# Altium PCB 剥皮器20200614.PCBDOC
Units mm, origin at the board's own origin, x right, y up, seen from the top; angles counter-clockwise.
Board outline 94.23 x 92 mm, 4 copper layers (Top Layer, MidLayer1, MidLayer2, Bottom Layer); 71 components, 81 nets, 348 pads, 574 vias.
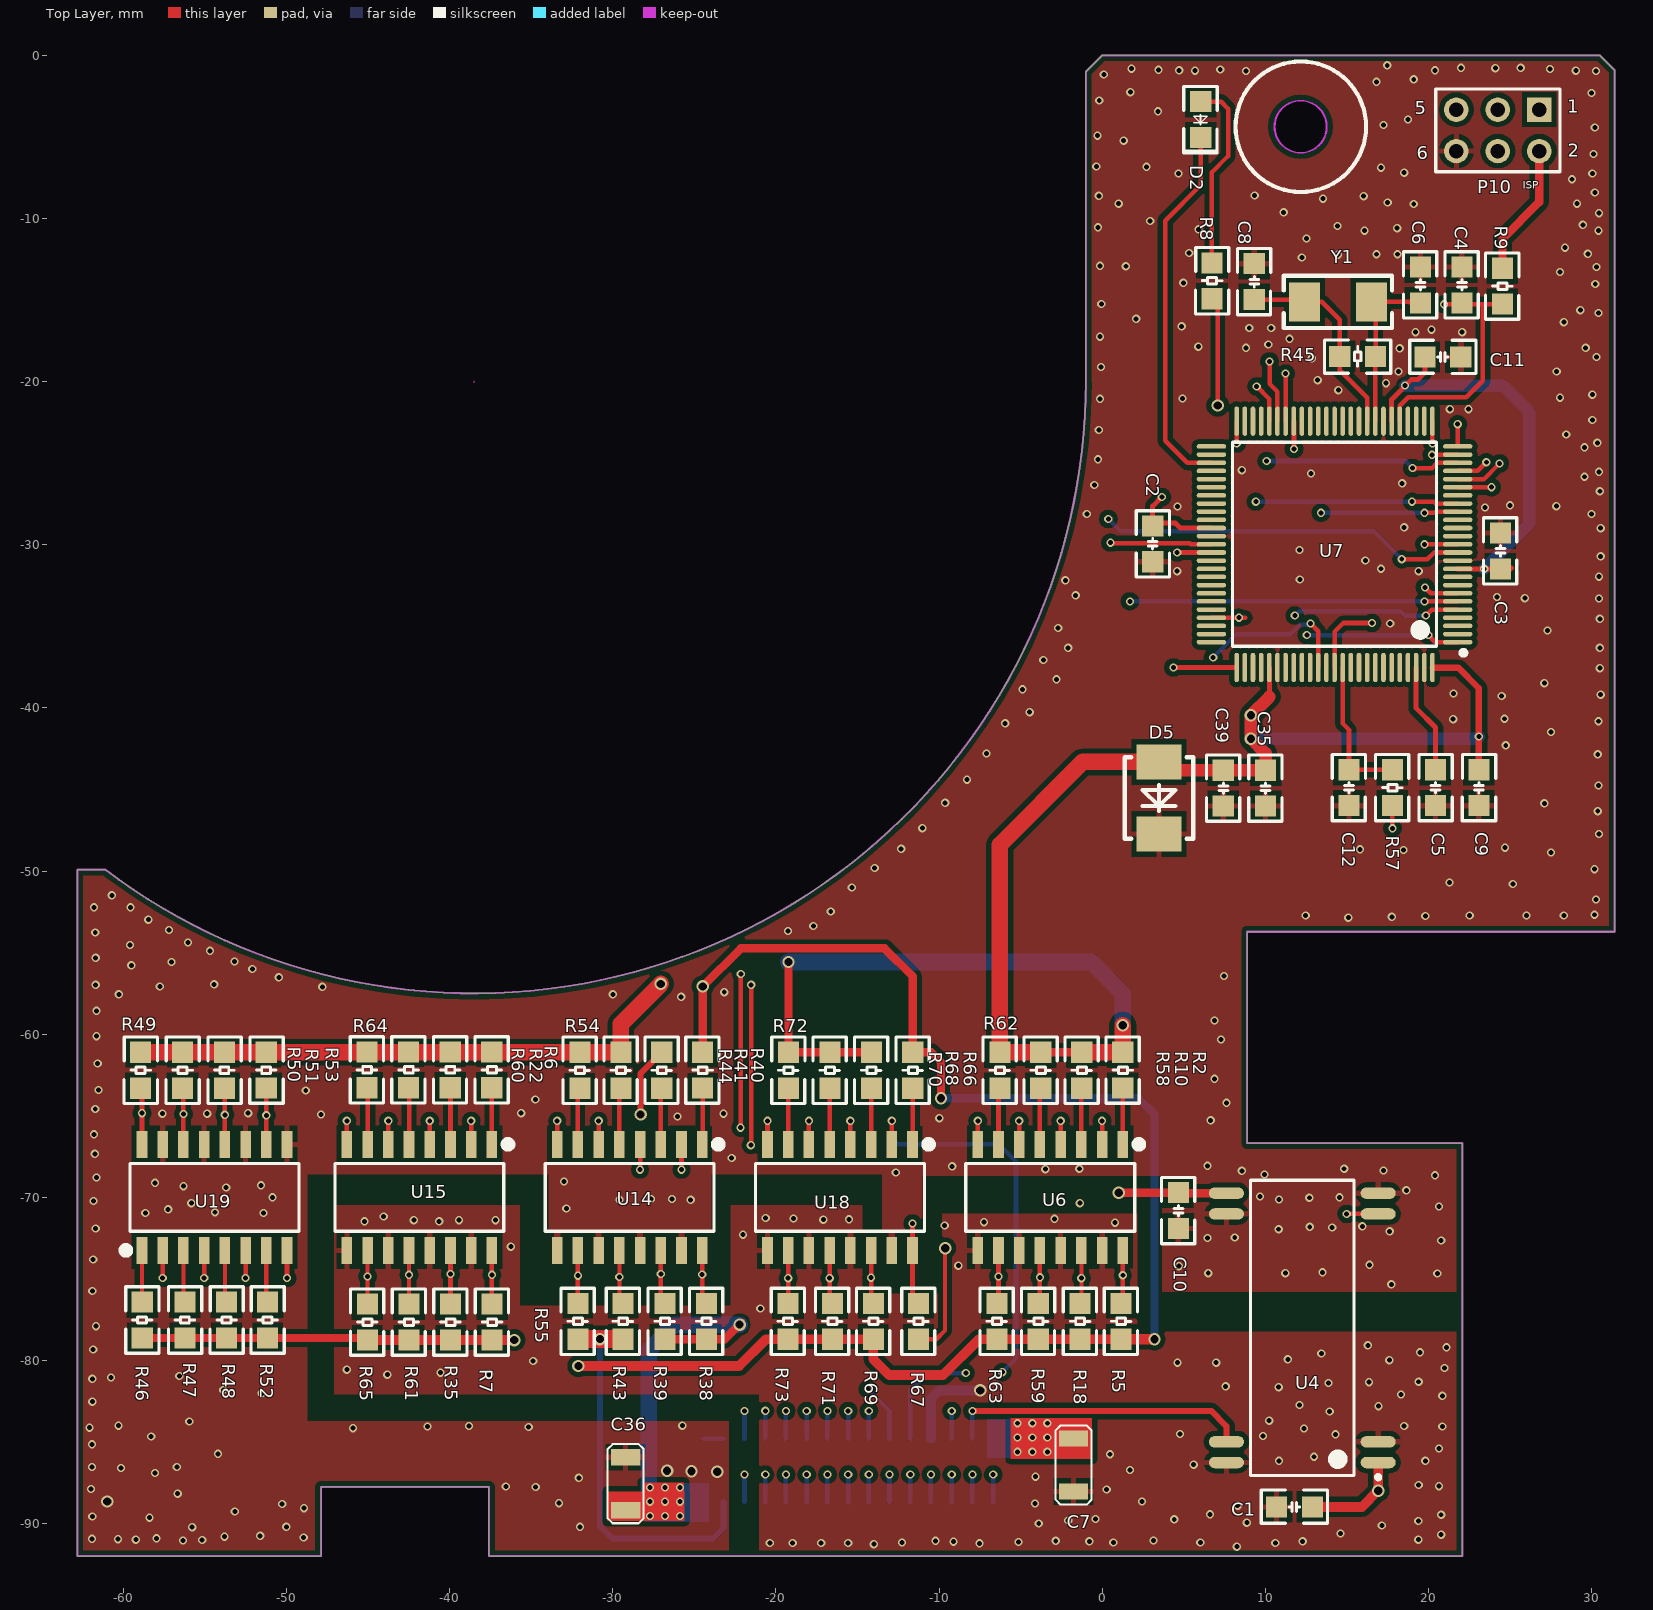
[diagram p0: Top Layer view]
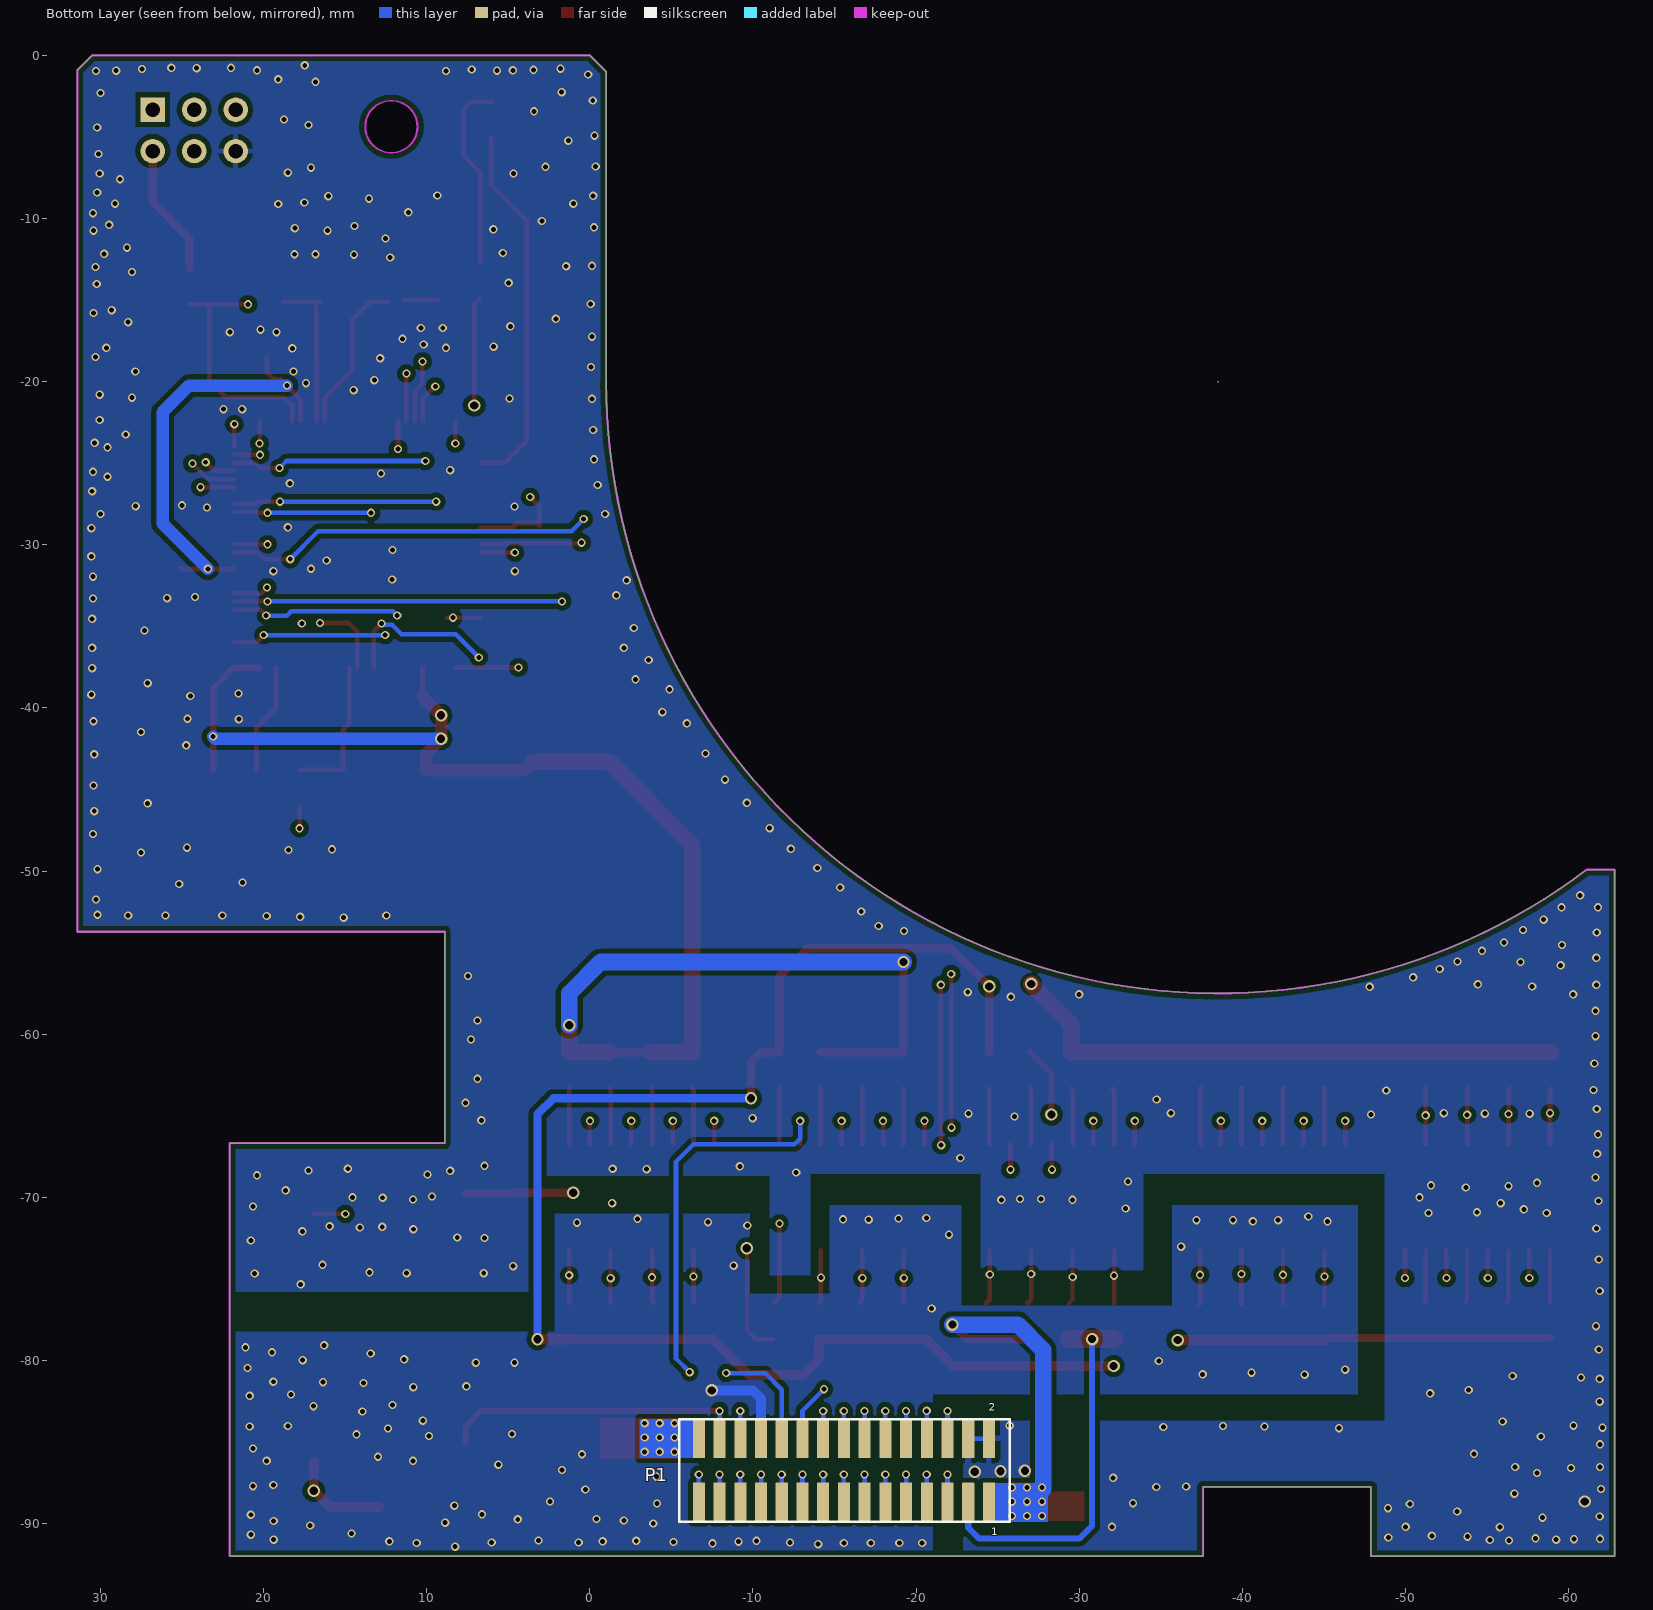
[diagram p1: Bottom Layer view, seen from below]
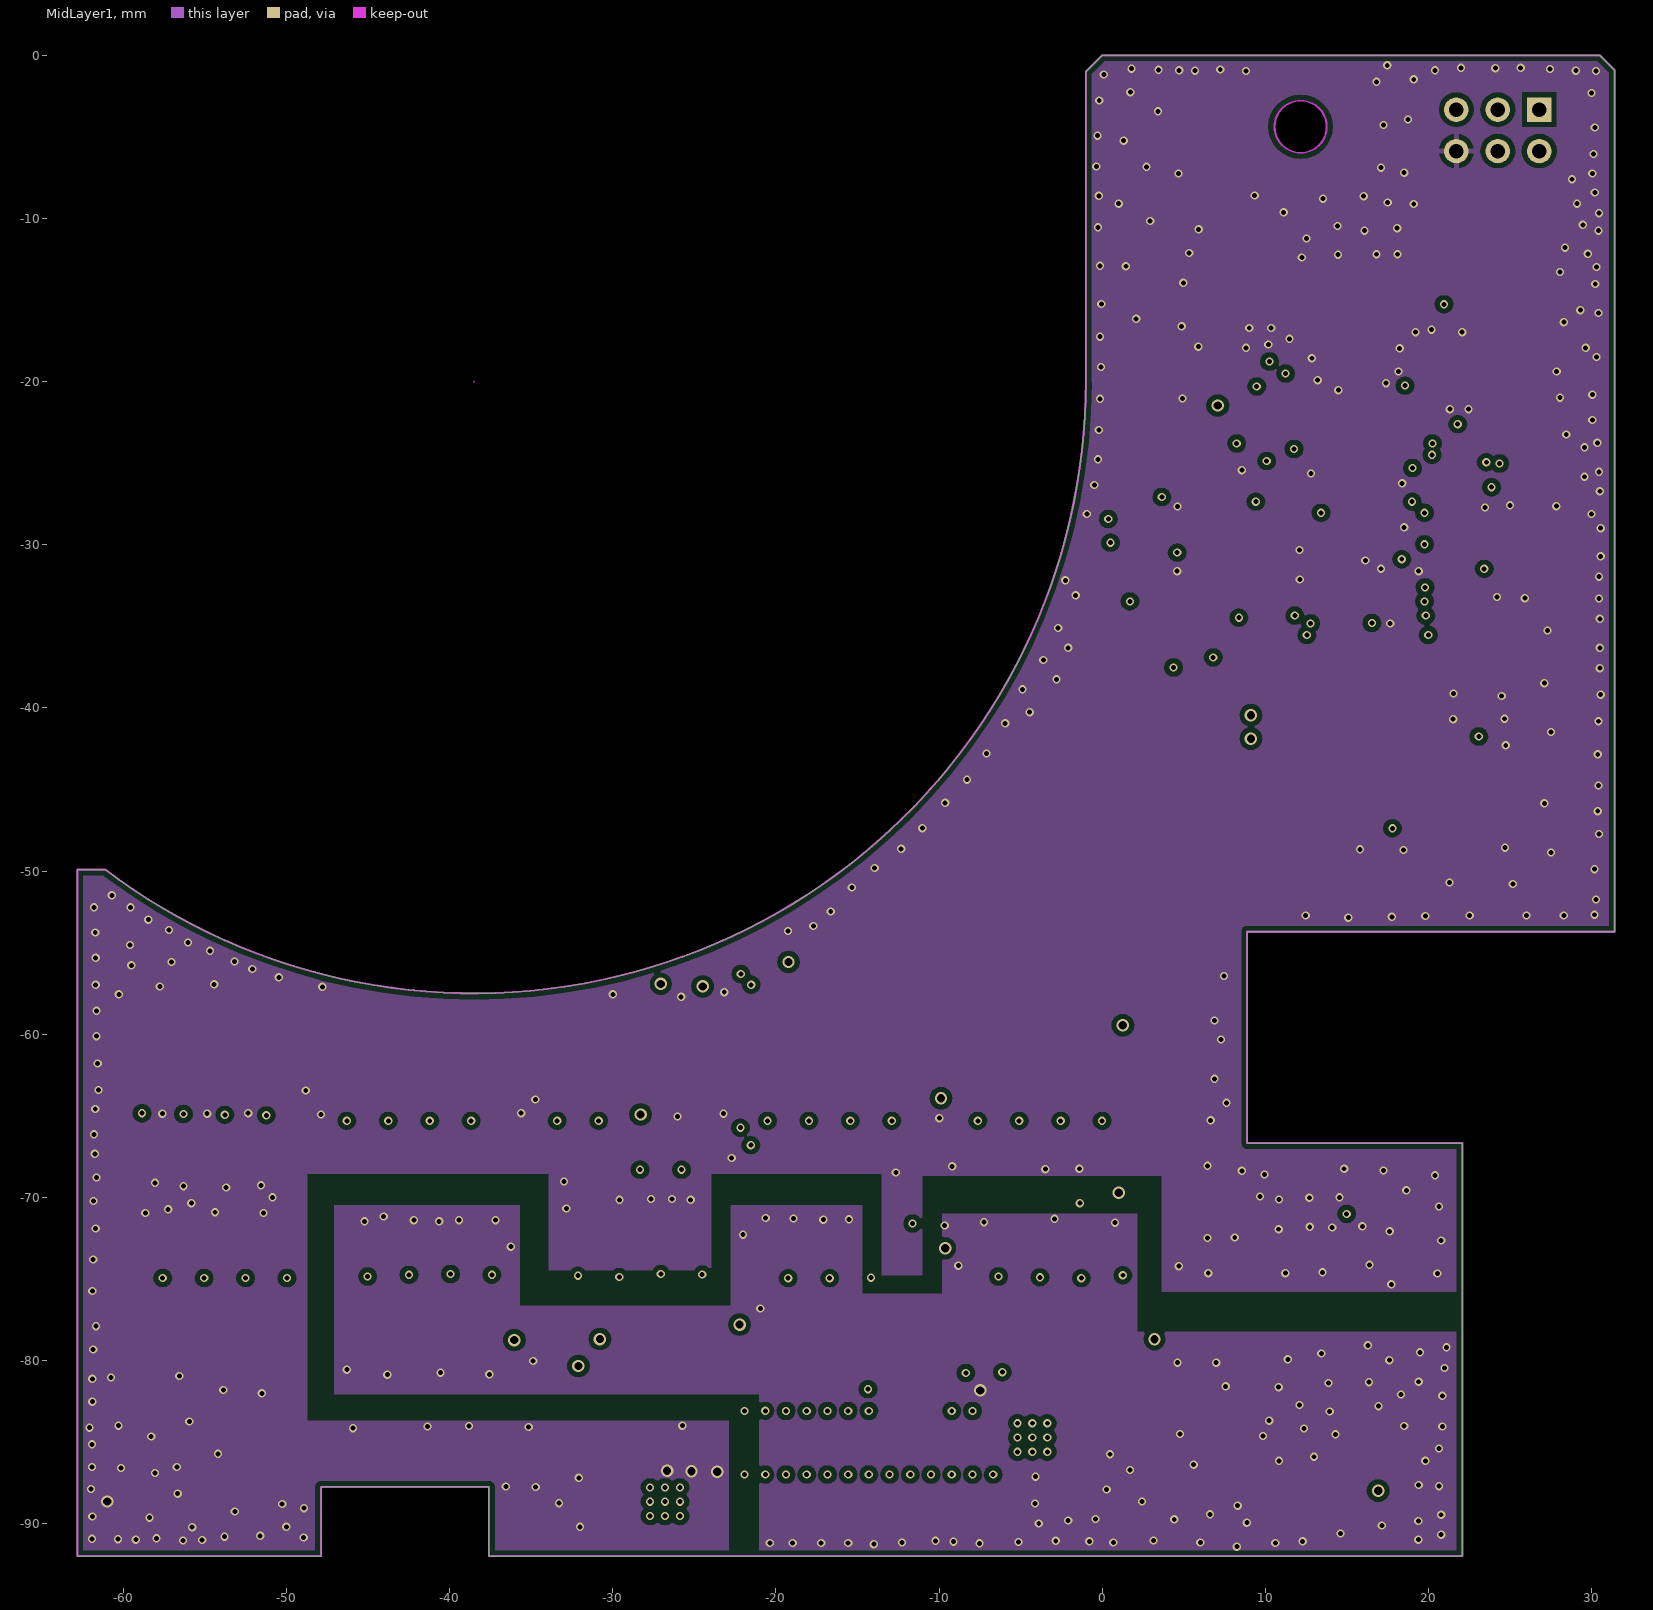
[diagram p2: MidLayer1]
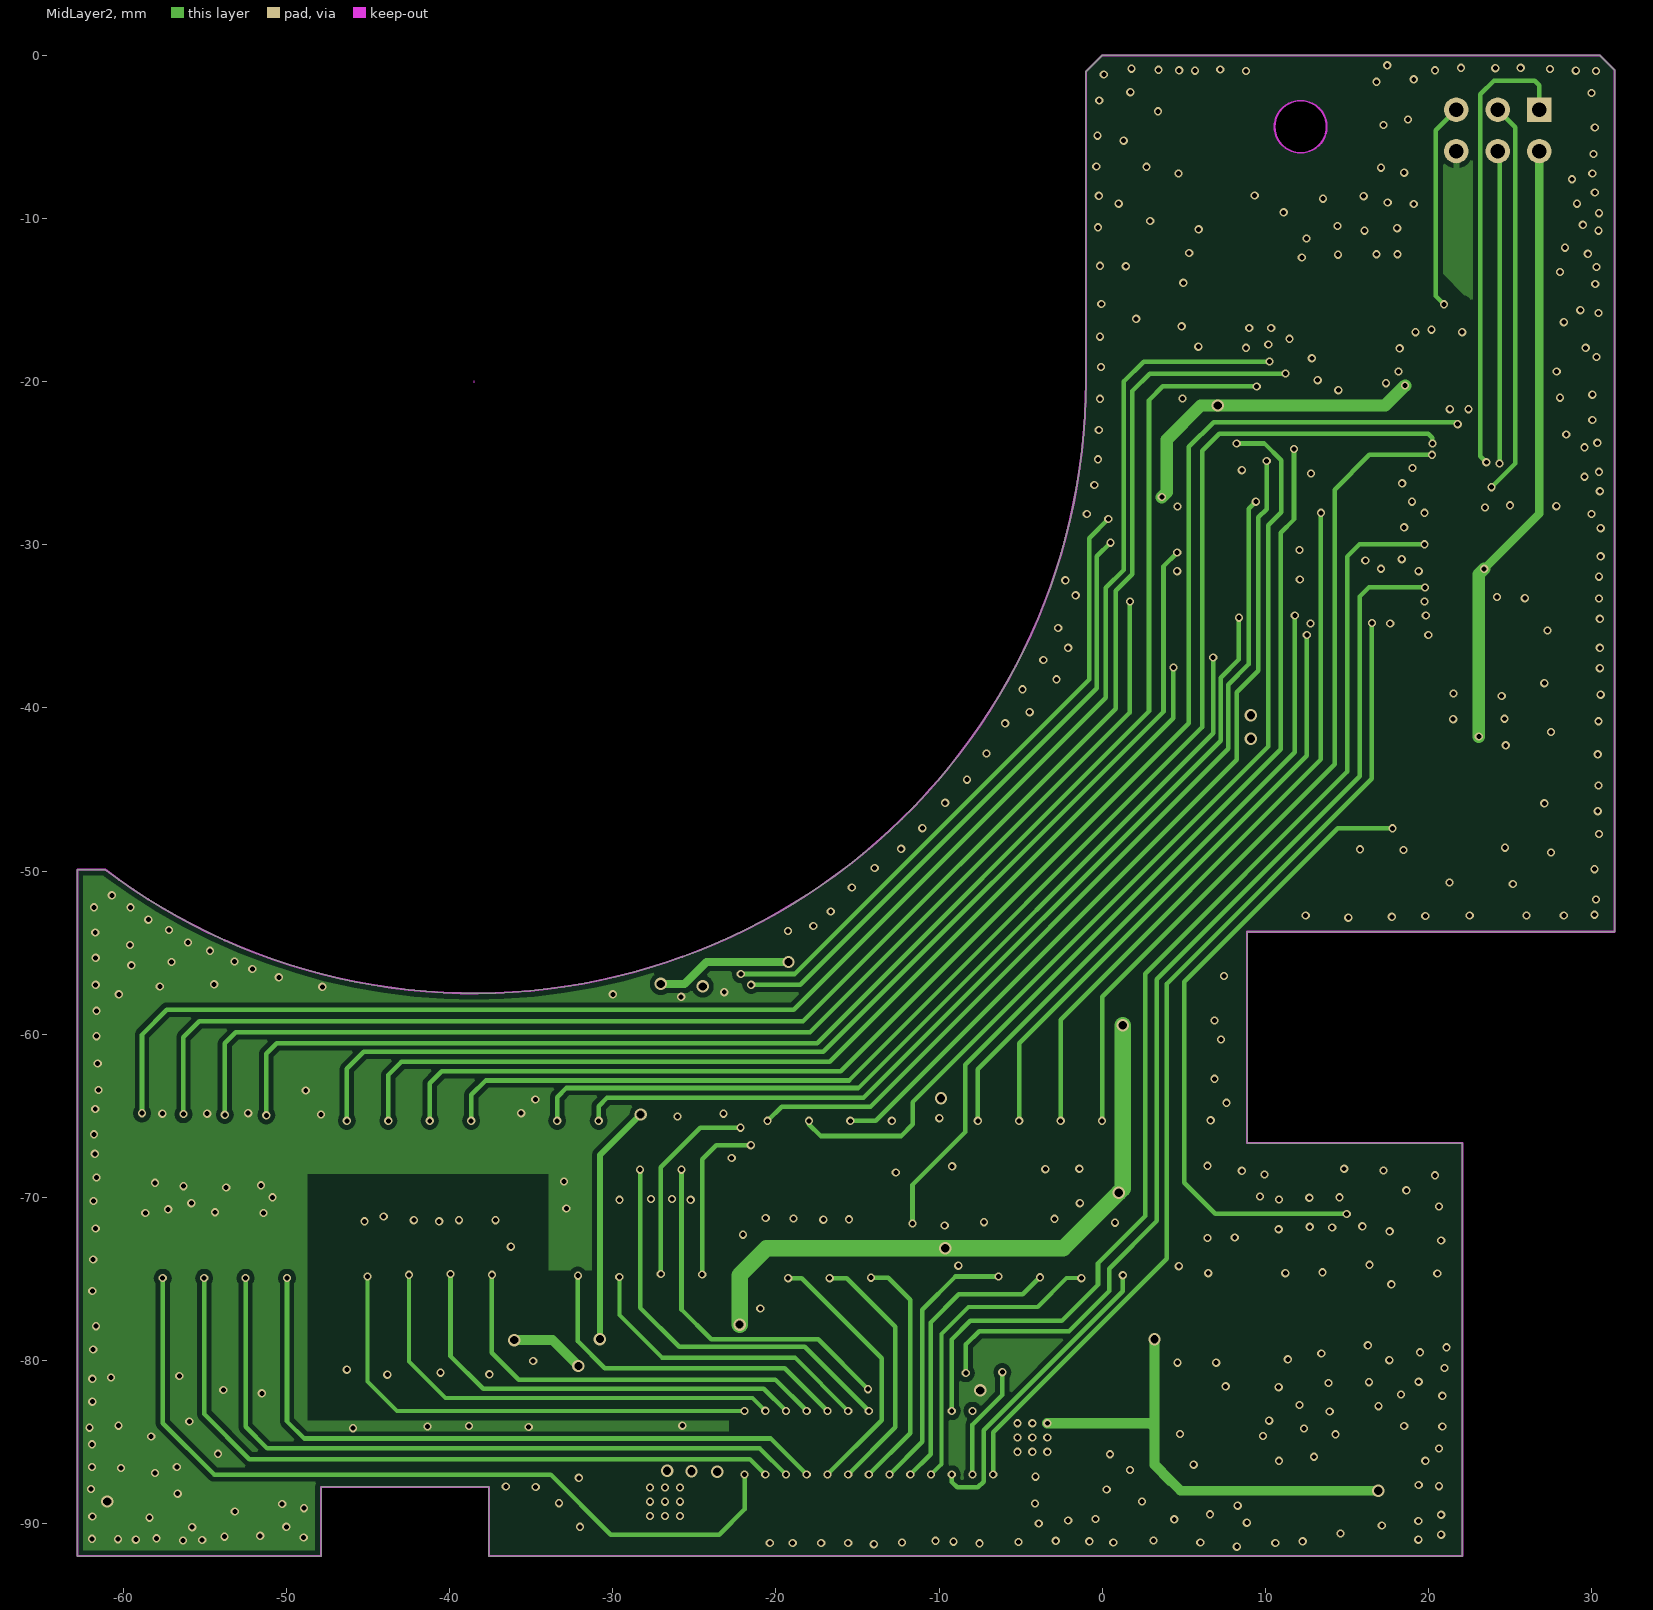
[diagram p3: MidLayer2]

## Layer stack, top to bottom
Top Layer: signal copper 0.0356
Dielectric: core 0.32, FR-4, Dk 4.8
MidLayer1: signal copper 0.0356
Dielectric: prepreg 0.32, FR-4, Dk 4.8
MidLayer2: signal copper 0.0356
Dielectric: core 0.32, FR-4, Dk 4.8
Bottom Layer: signal copper 0.0356

## Board outline
-62.819,-92 -47.879,-92 -47.879,-87.757 -37.592,-87.757 -37.592,-92 22.082,-92 22.082,-66.675 8.89,-66.675 8.89,-53.721 31.415,-53.721 31.415,-0.915 30.5,0 0,0 -1,-1 -1,-20 cw(c-38.5,-20) -61.12,-49.909 -61.12,-49.911 -62.819,-49.911
cut-out: 10.578,-4.375 ccw(c12.178,-4.375) 12.178,-5.975 ccw(c12.178,-4.375) 13.778,-4.375 ccw(c12.178,-4.375) 12.178,-2.775 ccw(c12.178,-4.375)

## Design rules (kind name [scope] priority, off if disabled: settings)
Clearance Clearance_1 [InPolygon] p1: gap=0.305
Clearance [All] p2: gap=0.127
FabricationTestPointUsage TestPointUsage [All] p1: valid=0 allowmultiple=FALSE
FabricationTestpoint Testpoint [All] p1: side=3 testpointundercomponent=TRUE minsize=1.016 maxsize=2.54 preferedsize=1.524 minholesize=0 maxholesize=1.016 preferedholesize=0.813 testpointgrid=0.025 allowsidetop=TRUE allowsidebottom=TRUE usegrid=TRUE gridtolerance=0
PolygonConnect PolygonConnect_1 [IsVia] p1: connectstyle=Direct reliefconductorwidth=0.254 reliefentries=4 polygonreliefangle="90 Angle"
PolygonConnect [All] p2: connectstyle=Relief reliefconductorwidth=0.35 reliefentries=4 polygonreliefangle="90 Angle"
RoutingVias [All] p1: holewidth=0.711 width=1.27 viastyle="Through Hole" minholewidth=0.711 minwidth=1.27 maxholewidth=0.711 maxwidth=1.27
SilkscreenOverComponentPads [All] p1: minsilkscreentomaskgap=0.254
SolderMaskExpansion [All] p1: expansion=0.102
Width [All] p1: maxlimit=10 minlimit=0.1 preferedwidth=0.28
25 further rules are at their usual default settings.

## Components (designator, comment, footprint, x,y, rotation, side; value= is the part's Value field where it differs from the comment)
C1 "104" 0805-C 11.786,-88.976 r0 top
C2 "104" 0805-C 3.099,-29.943 r270 top
C3 "104" 0805-C 24.409,-30.378 r90 top
C4 "104" 0805-C 22.047,-14.072 r90 top
C5 "104" 0805-C 20.429,-44.893 r270 top
C6 "30pF" 0805-C 19.507,-14.072 r90 top
C7 "22uF/25V" 1206C -1.753,-84.785 r270 top
C8 "30pF" 0805-C 9.322,-13.868 r90 top
C9 "104" 0805-C 23.089,-44.893 r270 top
C10 "104" 0805-C 4.674,-70.815 r90 top
C11 "104" 0805-C 20.879,-18.491 r0 top
C12 "104" 0805-C 15.132,-44.893 r90 top
C35 "47uF" 0805-C 10.017,-44.922 r90 top
C36 "22uF/25V" 1206C -29.21,-89.179 r90 top
C39 "47uF" 0805-C 7.426,-44.922 r90 top
D2 "红色" 0805-LED 6.04,-3.939 r90 top
D5 "SMBJ5.0A" LC-SMB(DO-214AA)_S2 3.481,-45.524 r90 top
P1 "Header 15X2" SIP15-1.27 -15.575,-86.743 r0 bottom locked
P10 "2.54针" HDR2X3 26.792,-3.329 r180 top
R2 "330R" 0805-R#1 1.265,-62.206 r270 top
R5 "10K" 0805-R#1 1.164,-77.599 r270 top
R6 "330R" 0805-R#1 -37.413,-62.186 r270 top
R7 "10K" 0805-R#1 -37.394,-77.65 r270 top
R8 "1K" 0805-R#2 6.731,-13.818 r270 top
R9 "10K" 0805-R#2 24.536,-14.148 r90 top
R10 "330R" 0805-R#1 -1.247,-62.211 r270 top
R18 "10K" 0805-R#2 -1.351,-77.599 r90 top
R22 "330R" 0805-R#2 -39.962,-62.186 r90 top
R35 "10K" 0805-R#1 -39.942,-77.65 r270 top
R38 "10K" 0805-R#1 -24.262,-77.599 r270 top
R39 "10K" 0805-R#1 -26.802,-77.599 r270 top
R40 "330R" 0805-R#1 -24.49,-62.206 r270 top
R41 "330R" 0805-R#1 -26.998,-62.211 r270 top
R43 "10K" 0805-R#1 -29.367,-77.599 r270 top
R44 "330R" 0805-R#1 -29.505,-62.211 r270 top
R45 "1M" 0805-R#1 15.662,-18.452 r0 top
R46 "330R" 0805-R#1 -58.844,-77.523 r90 top
R47 "330R" 0805-R#1 -56.228,-77.523 r90 top
R48 "330R" 0805-R#1 -53.675,-77.523 r90 top
R49 "10K" 0805-R#1 -58.944,-62.211 r90 top
R50 "10K" 0805-R#1 -56.375,-62.211 r90 top
R51 "10K" 0805-R#1 -53.806,-62.211 r90 top
R52 "330R" 0805-R#1 -51.16,-77.523 r90 top
R53 "10K" 0805-R#1 -51.237,-62.206 r90 top
R54 "330R" 0805-R#1 -32.012,-62.211 r270 top
R55 "10K" 0805-R#1 -32.136,-77.599 r270 top
R57 "2K" 0805-R#1 17.792,-44.893 r270 top
R58 "330R" 0805-R#1 -3.76,-62.211 r270 top
R59 "10K" 0805-R#1 -3.916,-77.599 r270 top
R60 "330R" 0805-R#1 -42.51,-62.186 r270 top
R61 "10K" 0805-R#1 -42.491,-77.65 r270 top
R62 "330R" 0805-R#1 -6.273,-62.211 r270 top
R63 "10K" 0805-R#1 -6.456,-77.599 r270 top
R64 "330R" 0805-R#1 -45.059,-62.186 r270 top
R65 "10K" 0805-R#1 -45.039,-77.65 r270 top
R66 "330R" 0805-R#1 -11.607,-62.211 r270 top
R67 "10K" 0805-R#1 -11.257,-77.599 r270 top
R68 "330R" 0805-R#1 -14.147,-62.211 r270 top
R69 "10K" 0805-R#1 -14.026,-77.599 r270 top
R70 "330R" 0805-R#1 -16.687,-62.211 r270 top
R71 "10K" 0805-R#1 -16.54,-77.599 r270 top
R72 "330R" 0805-R#1 -19.227,-62.211 r270 top
R73 "10K" 0805-R#1 -19.258,-77.599 r270 top
U4 "ISO124U" SOIC127P1030X265-8 12.268,-78.003 r180 top
U6 "TLP291-4" TLP291-4 -3.18,-70.004 r180 top
U7 "ATmega2560-16AU" LC-LQFP-100_14x14x05P 14.245,-29.974 r90 top
U14 "TLP291-4" TLP291-4 -28.961,-70.004 r180 top
U15 "TLP291-4" TLP291-4 -41.852,-70.004 r180 top
U18 "TLP291-4" TLP291-4 -16.071,-70.004 r180 top
U19 "TLP291-4" TLP291-4 -54.412,-70.004 r0 top
Y1 "16M" LC-SMD-5032_2P 14.453,-15.113 r180 top

## Footprints (in the part's own frame and the unit in brackets; to place one, negate y for a bottom-side part, rotate by r counter-clockwise, add the part's x,y. Pads: shape width x height; smd on the part's side, far side on the other; paste and mask are expansions set on the pad)
0805-C [mil] "0805贴片电容"
  rect 51x51 smd: 1(-43.31,0) 2(43.31,0)
  silkscreen extent -80,-40 80,41
0805-LED [mil] "0805LED"
  rect 51x51 smd: 1(43.31,0) 2(-43.31,0)
  silkscreen extent -81,-41 80,41
0805-R#1 [mil] "0805电阻"
  rect 51x51 smd: 1(43.31,0) 2(-43.31,0)
  silkscreen extent -80,-41 80,40
0805-R#2 [mil] "0805电阻"
  rect 51x51 smd: 1(-43.31,0) 2(43.31,0)
  silkscreen extent -80,-40 80,41
1206C [mm]
  rect 1x1.8 smd: 1(0,0) 2(3.25,0)
  silkscreen extent -0.8,-1.1 4.05,1.1
HDR2X3 [mm] "Connector; Header; 3x2 Position"
  rect 1.5x1.5 hole 0.9: 1(0,0)
  round 1.5 hole 0.9: 2(0,2.54) 3(2.54,0) 4(2.54,2.54) 5(5.08,0) 6(5.08,2.54)
  silkscreen extent -1.27,-1.27 6.35,3.81
LC-LQFP-100_14x14x05P [mm]
  oval 0.28x1.8 smd mask+0.051: 1(-6,-7.55) 2(-5.5,-7.55) 3(-5,-7.55) 4(-4.5,-7.55) 5(-4,-7.55) 6(-3.5,-7.55) 7(-3,-7.55) 8(-2.5,-7.55) 9(-2,-7.55) 10(-1.5,-7.55) 11(-1,-7.55) 12(-0.5,-7.55) 13(0,-7.55) 14(0.5,-7.55) 15(1,-7.55) 16(1.5,-7.55) 17(2,-7.55) 18(2.5,-7.55) 19(3,-7.55) 20(3.5,-7.55) 21(4,-7.55) 22(4.5,-7.55) 23(5,-7.55) 24(5.5,-7.55) 25(6,-7.55) 51(6,7.55) 52(5.5,7.55) 53(5,7.55) 54(4.5,7.55) 55(4,7.55) 56(3.5,7.55) 57(3,7.55) 58(2.5,7.55) 59(2,7.55) 60(1.5,7.55) 61(1,7.55) 62(0.5,7.55) 63(0,7.55) 64(-0.5,7.55) 65(-1,7.55) 66(-1.5,7.55) 67(-2,7.55) 68(-2.5,7.55) 69(-3,7.55) 70(-3.5,7.55) 71(-4,7.55) 72(-4.5,7.55) 73(-5,7.55) 74(-5.5,7.55) 75(-6,7.55)
  oval 1.8x0.28 smd mask+0.051: 26(7.55,-6) 27(7.55,-5.5) 28(7.55,-5) 29(7.55,-4.5) 30(7.55,-4) 31(7.55,-3.5) 32(7.55,-3) 33(7.55,-2.5) 34(7.55,-2) 35(7.55,-1.5) 36(7.55,-1) 37(7.55,-0.5) 38(7.55,0) 39(7.55,0.5) 40(7.55,1) 41(7.55,1.5) 42(7.55,2) 43(7.55,2.5) 44(7.55,3) 45(7.55,3.5) 46(7.55,4) 47(7.55,4.5) 48(7.55,5) 49(7.55,5.5) 50(7.55,6) 76(-7.55,6) 77(-7.55,5.5) 78(-7.55,5) 79(-7.55,4.5) 80(-7.55,4) 81(-7.55,3.5) 82(-7.55,3) 83(-7.55,2.5) 84(-7.55,2) 85(-7.55,1.5) 86(-7.55,1) 87(-7.55,0.5) 88(-7.55,0) 89(-7.55,-0.5) 90(-7.55,-1) 91(-7.55,-1.5) 92(-7.55,-2) 93(-7.55,-2.5) 94(-7.55,-3) 95(-7.55,-3.5) 96(-7.55,-4) 97(-7.55,-4.5) 98(-7.55,-5) 99(-7.55,-5.5) 100(-7.55,-6)
  silkscreen extent -6.8,-8.05 6.25,6.25
LC-SMB(DO-214AA)_S2 [mm]
  rect 2.159x2.743 smd: 1(2.21,0) 2(-2.21,0)
  silkscreen extent -2.5,-2.1 2.5,2.1
LC-SMD-5032_2P [mm]
  rect 1.9x2.4 smd: 1(-2.05,0) 2(2.05,0)
  silkscreen extent -3.32,-1.6 3.32,1.6
SIP15-1.27 [mm]
  rrect5% 0.74x2.4 smd: 1(-8.89,1.95) 2(-8.89,-1.95) 3(-7.62,1.95) 4(-7.62,-1.95) 5(-6.35,1.95) 6(-6.35,-1.95) 7(-5.08,1.95) 8(-5.08,-1.95) 9(-3.81,1.95) 10(-3.81,-1.95) 11(-2.54,1.95) 12(-2.54,-1.95) 13(-1.27,1.95) 14(-1.27,-1.95) 15(0,1.95) 16(0,-1.95) 17(1.27,1.95) 18(1.27,-1.95) 19(2.54,1.95) 20(2.54,-1.95) 21(3.81,1.95) 22(3.81,-1.95) 23(5.08,1.95) 24(5.08,-1.95) 25(6.35,1.95) 26(6.35,-1.95) 27(7.62,1.95) 28(7.62,-1.95) 29(8.89,1.95) 30(8.89,-1.95)
  silkscreen extent -10.16,-3.15 10.11,3.15
SOIC127P1030X265-8 [mm] "SOIC, 28-Leads, Body 18.1x7.6mm (max), Pitch 1.27mm, IPC Medium Density"
  oval 2.15x0.7 smd: 1(-4.65,8.255) 2(-4.65,6.985) 13(-4.65,-6.985) 14(-4.65,-8.255) 15(4.65,-8.255) 16(4.65,-6.985) 27(4.65,6.985) 28(4.65,8.255)
  silkscreen extent -4.78,-9.05 3.18,9.28
TLP291-4 [mm]
  rect 0.65x1.65 smd: 1(-4.445,-3.25) 2(-3.175,-3.25) 3(-1.905,-3.25) 4(-0.635,-3.25) 5(0.635,-3.25) 6(1.905,-3.25) 7(3.175,-3.25) 8(4.445,-3.25) 9(4.445,3.25) 10(3.175,3.25) 11(1.905,3.25) 12(0.635,3.25) 13(-0.635,3.25) 14(-1.905,3.25) 15(-3.175,3.25) 16(-4.445,3.25)
  silkscreen extent -5.63,-3.45 5.18,2.08, body extent -5.17,-3.5 5.18,3.5, height 2.3

## Part data
C1 C2 C3 C4 C5 C6 C8 C9 C10 C12 C35: library part Cap, "Capacitor"
C7 C11 C36 C39: library part CAP, "Capacitor"
D2: library part LED0, "Typical INFRARED GaAs LED"
D5: library part TVS, "TVS"
P1: "Header, 15-Pin, Dual row"
P10: library part "Header 3X2", "Header, 3-Pin, Dual row"
R2 R5 R6 R7 R8 R9 R10 R18 R22 R35 R38 R39 R40 R41 R43 R44 R45 R46 R47 R48 R49 R50 R51 R52 R53 R54 R55 R57 R58 R59 R60 R61 R62 R63 R64 R65 R66 R67 R68 R69 R70 R71 R72 R73: library part Res2, "Resistor"
U6 U14 U15 U18 U19: "Photocouplers GaAs Infrared LED & Photo Transistor"
U7: library part "Arduino MEGA 2560"
Y1: library part XTAL, "Crystal Oscillator"

## Via types
v1: diameter 0.508, hole 0.305, Top Layer to Bottom Layer, tented both sides, 552 vias
v2: diameter 0.762, hole 0.508, Top Layer to Bottom Layer, tented both sides, 22 vias

## Nets (pads, with @x,y where several pads share a name; then routed paths per layer and width w, separated by ;. In a path a pad name is that pad's centre, name@x,y a point inside that pad or via, vN(x,y) a via of type N, cw(c..) or ccw(c..) an arc to the next point about the centre after c; other vN are vias at no path point)
+3.3V: P1.3 R41.2 R43.1 R55.1 | length 43.1
  Top Layer w0.381: v2(-28.296,-64.922) -28.296,-62.409 R41.2
  Top Layer w1.1: R55.1 R43.1
  MidLayer2 w0.381: v2(-30.785,-78.689) -30.785,-67.412 v2(-28.296,-64.922)
  Bottom Layer w0.381: v2(-30.785,-78.689) -30.785,-90.145 -30.023,-90.907 -23.851,-90.907 -23.195,-90.251 P1.3
+5V: C1.2 C7.1 P1.30 R5.1 R7.1 R18.1 R35.1 R40.2 R46.2 R47.2 R48.2 R52.2 R59.1 R61.1 R63.1 R65.1 R66.2 R69.1 R71.1 R73.1 U4.1 | length 160.8
  Top Layer w0.254: R47.2 R48.2
  Top Layer w0.508: R46.2 R47.2 R48.2 R52.2 -45.166,-78.623 R65.1 ; R40.2 -24.49,-57.079 v2(-24.486,-57.074) -22.149,-54.737 -13.335,-54.737 -11.607,-56.465 R66.2 -10.466,-61.111 -9.881,-61.697 v2(-9.881,-63.932)
  Top Layer w0.6: R65.1 R61.1 ; v2@-36.017,-78.765 v2(-36.033,-78.75) R7.1 R35.1 ; v2(-32.106,-80.34) -22.25,-80.34 -20.609,-78.699 R73.1 R71.1 R69.1 -14.026,-79.929 -13.056,-80.899 -9.754,-80.899 -7.553,-78.699 R63.1 R59.1 R18.1 R5.1 ; C1.2 15.926,-88.976 v2(16.918,-87.984) U4.1 ; R61.1 R35.1 ; R61.1 R35.1
  Top Layer w0.635: R5.1 v2(3.21,-78.699)
  MidLayer2 w0.6: v2(-36.033,-78.75) -33.696,-78.75 v2(-32.106,-80.34) ; 4.184,-87.369 4.799,-87.984 v2(16.918,-87.984)
  MidLayer2 w0.635: v1(-3.362,-83.849) 2.934,-83.849 3.21,-84.125 ; v2(3.21,-78.699) 3.21,-84.125 ; 4.184,-87.369 3.21,-86.395 3.21,-84.125
  Bottom Layer w0.508: v2(-9.881,-63.932) 2.235,-63.932 3.21,-64.907 v2(3.21,-78.699)
  other v1: -5.191,-85.602 -4.277,-85.602 -3.362,-85.602 -5.191,-84.725 -4.277,-84.725 -3.362,-84.725 -5.191,-83.849 -4.277,-83.849
+5VV: C2.1 C3.1 C9.1 C10.2 C11.1 C35.2 C36.1 C39.2 D5.1 P1.1 P10.2 R2.2 R6.2 R8.2 R9.2 R10.2 R22.2 R38.1 R39.1 R44.2 R49.1 R50.1 R51.1 R53.1 R54.2 R58.2 R60.2 R62.2 R64.2 R67.1 R68.2 R70.2 R72.2 U4.15 U7.10 U7.31 U7.61 U7.80 U7.100 | length 348.9
  Top Layer w0.254: v2(-22.225,-77.8) v2@-22.022,-77.597 ; R67.1 -10.17,-78.699 -9.627,-78.156 v2(-9.627,-73.127) ; R8.2 7.087,-15.273 v2(7.087,-21.463)
  Top Layer w0.305: v1(3.658,-27.076) 3.099,-27.635 C2.1 3.265,-28.677 4.496,-28.677 4.793,-28.974 U7.61 ; C35.2 C35.2@10.245,-43.594 ; 10.245,-39.319 U7.80 ; U7.31 17.745,-21.092 18.974,-19.863 19.38,-19.863 19.779,-19.464 C11.1 ; U7.10 v1(23.419,-31.474) 25.046,-31.474 25.09,-31.429
  Top Layer w0.381: U7.100@20.255,-37.524 20.272,-37.541 21.844,-37.541 23.089,-38.786 v1(23.089,-41.758) C9.1
  Top Layer w0.508: R50.1 R51.1 -51.241,-61.111 R53.1 -45.079,-61.106 R64.2 R60.2 R22.2 R6.2 -32.038,-61.086 R54.2 ; R39.1 R38.1 -23.124,-78.699 v2(-22.225,-77.8) ; v2@-19.228,-55.575 v2(-19.227,-55.576) R72.2 R70.2 R68.2 ; R58.2 R10.2 ; v2(1.016,-69.723) 1.024,-69.715 C10.2 4.707,-69.748 U4.15 ; R2.2@1.261,-61.111 R2.2 ; R9.2 24.536,-11.252 26.792,-8.996 P10.2
  Top Layer w0.762: D5.1 3.989,-43.822 C35.2 10.017,-42.783 v2(9.119,-41.885) v2(9.119,-40.445) 10.245,-39.319
  Top Layer w1.016: R49.1 R54.2 R44.2 -29.505,-59.375 v2(-27.051,-56.921) ; R58.2 R62.2 -6.273,-48.386 -1.201,-43.314 D5.1 ; R10.2 R2.2@1.261,-61.111 ; R2.2 v2(1.265,-59.457)
  MidLayer2 w0.508: v2(-27.051,-56.921) -25.603,-56.921 -24.258,-55.576 v2(-19.227,-55.576) ; v1(23.419,-31.474) 26.792,-28.1 P10.2
  MidLayer2 w0.762: v1(3.658,-27.076) 3.962,-26.772 3.962,-23.546 6.045,-21.463 v2(7.087,-21.463) 17.348,-21.463 v1(18.567,-20.244) ; v1(23.089,-41.758) 23.089,-31.804 v1(23.419,-31.474)
  MidLayer2 w1.016: v2(-22.225,-77.8) -22.225,-74.778 -20.574,-73.127 -2.388,-73.127 v2(1.016,-69.723) 1.265,-69.474 v2(1.265,-59.457)
  Bottom Layer w0.762: v2(9.119,-41.885) 22.962,-41.885 v1(23.089,-41.758) ; v1(18.567,-20.244) 24.562,-20.244 26.187,-21.869 26.187,-28.705 v1(23.419,-31.474)
  Bottom Layer w1.016: v1@-27.788,-87.884 -27.788,-79.35 -26.238,-77.8 v2(-22.225,-77.8) ; v2(-19.227,-55.576) -0.659,-55.576 1.265,-57.501 v2(1.265,-59.457)
  other v1: -27.711,-89.535 -26.797,-89.535 -25.883,-89.535 -27.711,-88.659 -26.797,-88.659 -25.883,-88.659 -27.711,-87.782 -26.797,-87.782 -25.883,-87.782
ADC8: C12.2 R57.2 U7.89 | length 9.1
  Top Layer w0.28: U7.89 14.745,-40.957 15.132,-41.345 C12.2 R57.2
ADC8_IN: P1.28 U4.27 | length 18.6
  Top Layer w0.381: v1(-7.95,-83.095) 6.69,-83.095 7.618,-84.023 U4.27
  Bottom Layer w0.28: P1.28 v1@-7.955,-83.1
AGND: C2.2 C3.2 C4.2 C5.2 C6.2 C8.2 C9.2 C10.1 C11.2 C12.1 C35.1 C36.2 C39.1 D5.2 P1.2 P1.4 P10.6 U4.14 U4.16 U7.11 U7.32 U7.62 U7.81 U7.99 U14.9 U14.11 U14.13 U14.15 U18.15 U19.9 U19.11 U19.13 U19.15 | length 1.3
  Bottom Layer w0.28: P1.2 P1.4
  other v1: -56.337,-91.034 -55.169,-91.008 -59.233,-90.983 -60.325,-90.957 -61.925,-90.932 -57.963,-90.907 -48.946,-90.856 -53.797,-90.805 -51.613,-90.754 -55.778,-90.221 -50.013,-90.195 -32.004,-90.195 -58.395,-89.637 -61.9,-89.56 -53.162,-89.256 -48.92,-89.052 -50.267,-88.798 -33.299,-88.748 -56.667,-88.163 -61.976,-87.884 -34.722,-87.757 -36.551,-87.732 -32.08,-87.198 -58.064,-86.893 -60.147,-86.589 -61.925,-86.538 -56.718,-86.538 -54.204,-85.725 -61.925,-85.141 -58.293,-84.658 -45.923,-84.15 -62.078,-84.125 -35.154,-84.074 -41.351,-84.049 -38.811,-84.023 -60.3,-83.998 -25.735,-83.998 -55.956,-83.744 -61.9,-82.525 -51.511,-82.017 -53.873,-81.813 -61.9,-81.128 -60.757,-81.051 -56.566,-80.95 -61.849,-79.324 -61.671,-77.902 -61.9,-75.743 17.729,-75.336 20.549,-74.676 6.502,-74.651 11.227,-74.651 13.513,-74.6 4.699,-74.219 16.383,-74.143 -61.849,-73.812 20.777,-72.644 6.452,-72.492 8.128,-72.466 17.628,-72.085 10.82,-71.958 -61.697,-71.907 14.097,-71.857 12.725,-71.806 15.951,-71.78 -58.649,-70.968 -51.41,-70.968 -54.381,-70.917 -57.252,-70.739 -32.842,-70.688 20.65,-70.561 -55.829,-70.358 -61.824,-70.231 -29.591,-70.155 -25.222,-70.155 10.846,-70.129 -27.661,-70.104 -26.365,-70.104 12.7,-70.028 -50.851,-70.002 14.554,-70.002 9.677,-69.952 18.644,-69.571 -53.696,-69.393 -56.312,-69.317 -51.562,-69.266 -58.064,-69.113 -32.995,-69.037 -61.646,-68.783 20.396,-68.656 9.957,-68.605 -12.649,-68.478 8.56,-68.377 17.247,-68.351 -3.48,-68.275 -1.397,-68.25 14.834,-68.25 -9.195,-68.097 6.452,-68.072 -22.708,-67.589 -61.747,-67.335 -61.798,-66.142 6.655,-65.278 -9.982,-65.151 -26.035,-65.049 -47.879,-64.922 -57.607,-64.872 -54.864,-64.872 -23.216,-64.872 -52.349,-64.846 -35.611,-64.846 -61.722,-64.592 7.62,-64.211 -34.747,-64.008 -48.819,-63.449 -61.519,-63.424 6.883,-62.738 -61.57,-61.798 7.29,-60.325 -61.646,-60.122 6.883,-59.157 -61.646,-58.572 -25.806,-57.709 -60.274,-57.556 -29.999,-57.561 -23.165,-57.429 -47.803,-57.099 -57.76,-57.074 -61.697,-56.972 -54.432,-56.947 -50.47,-56.515 7.468,-56.439 -52.095,-56.007 -59.512,-55.778 -57.048,-55.575 -53.188,-55.55 -61.697,-55.321 -54.686,-54.889 -59.588,-54.534 -56.032,-54.381 -61.722,-53.772 -19.253,-53.67 -57.201,-53.619 -17.704,-53.365 -58.471,-52.984 15.088,-52.857 17.755,-52.807 19.812,-52.756 12.471,-52.73 22.53,-52.73 26.01,-52.73 28.296,-52.73 30.175,-52.68 -16.637,-52.476 -61.798,-52.222 -59.563,-52.222 30.277,-51.74 -60.706,-51.486 -15.342,-51.003 25.171,-50.8 21.285,-50.698 30.175,-49.886 -13.945,-49.809 27.508,-48.87 18.466,-48.717 15.799,-48.666 -12.319,-48.641 24.689,-48.565 30.455,-47.727 -11.024,-47.371 30.378,-46.33 27.102,-45.847 -9.627,-45.822 30.429,-44.755 -8.28,-44.399 30.378,-42.85 -7.087,-42.799 24.74,-42.291 27.508,-41.478 -5.944,-40.945 30.429,-40.818 21.514,-40.691 24.663,-40.665 -4.445,-40.259 24.486,-39.268 30.556,-39.192 21.539,-39.116 -4.877,-38.862 27.102,-38.481 -2.794,-38.252 30.505,-37.567 -3.607,-37.059 -2.083,-36.322 30.505,-36.322 27.305,-35.255 -2.692,-35.103 17.653,-34.823 30.505,-34.544 30.455,-33.299 25.908,-33.274 24.206,-33.198 -1.626,-33.096 -2.261,-32.182 12.116,-32.131 30.455,-31.953 4.597,-31.623 19.406,-31.623 17.094,-31.471 16.129,-30.963 30.556,-30.709 12.09,-30.328 30.556,-28.981 18.517,-28.931 -0.94,-28.118 29.997,-28.118 23.47,-27.711 4.623,-27.661 27.838,-27.635 24.994,-27.584 30.505,-26.721 -0.483,-26.34 18.39,-26.238 29.566,-25.832 12.802,-25.629 30.455,-25.527 8.56,-25.425 -0.254,-24.765 29.566,-24.028 30.353,-23.749 28.448,-23.241 -0.203,-22.962 30.048,-22.352 21.311,-21.692 22.454,-21.692 -0.127,-21.057 4.928,-21.031 28.067,-20.98 30.048,-20.803 14.478,-20.523 17.399,-20.091 13.208,-19.914 18.161,-19.38 27.864,-19.38 -0.076,-19.101 12.852,-18.567 30.302,-18.491 18.237,-17.958 8.814,-17.932 29.642,-17.932 5.893,-17.856 10.185,-17.729 11.481,-17.374 -0.127,-17.247 19.202,-16.967 22.068,-16.967 20.193,-16.815 9.017,-16.713 10.363,-16.713 4.877,-16.612 28.296,-16.358 2.083,-16.154 30.429,-15.799 29.312,-15.621 -0.051,-15.24 30.226,-14.021 4.978,-13.945 28.067,-13.284 30.302,-12.979 1.448,-12.929 -0.127,-12.903 12.243,-12.395 14.453,-12.217 16.815,-12.192 18.11,-12.192 29.769,-12.167 5.334,-12.116 28.372,-11.786 12.522,-11.227 16.078,-10.744 30.429,-10.744 5.918,-10.668 18.085,-10.592 -0.254,-10.541 14.427,-10.465 29.464,-10.389 2.946,-10.16 30.455,-9.677 11.125,-9.627 19.101,-9.119 1.016,-9.093 29.108,-9.093 17.501,-9.017 13.538,-8.788 16.027,-8.636 -0.203,-8.611 9.347,-8.585 30.201,-8.407 28.804,-7.595 4.674,-7.239 30.048,-7.239 18.517,-7.188 17.094,-6.883 2.718,-6.833 -0.356,-6.807 30.124,-6.045 1.321,-5.232 -0.279,-4.928 30.201,-4.42 17.247,-4.267 18.745,-3.937 3.429,-3.429 -0.178,-2.769 29.997,-2.311 1.727,-2.261 16.815,-1.626 19.101,-1.473 0.102,-1.168 8.814,-0.965 30.277,-0.965 5.69,-0.94 29.032,-0.94 4.724,-0.914 20.396,-0.914 3.454,-0.889 7.239,-0.864 27.457,-0.838 1.803,-0.813 24.105,-0.787 21.996,-0.762 25.654,-0.762 17.475,-0.61
  other v2: -60.985,-88.646 -23.597,-86.817 -25.171,-86.792 -26.67,-86.766
GND: C1.1 C7.2 P1.24 U4.2 U4.28 U6.9 U6.11 U6.13 U6.15 U15.9 U15.11 U15.13 U15.15 U18.9 U18.11 U18.13 | length 5.7
  Bottom Layer w0.6: P1.24 -10.495,-82.326 -10.008,-81.839 v2(-7.468,-81.839)
  other v1: 8.255,-91.415 -13.995,-91.262 -7.518,-91.211 -20.371,-91.186 -18.974,-91.186 -17.221,-91.186 -15.57,-91.186 10.617,-91.186 -12.268,-91.161 0.686,-91.161 6.02,-91.161 -5.131,-91.135 -9.119,-91.11 -0.787,-91.084 12.294,-91.084 -10.211,-91.059 -2.845,-91.059 3.15,-91.034 19.38,-90.983 20.777,-90.678 14.605,-90.602 17.145,-90.119 -3.886,-89.992 8.865,-89.941 19.38,-89.84 -2.083,-89.814 4.42,-89.738 -0.406,-89.713 20.777,-89.459 6.604,-89.433 8.306,-88.9 -4.115,-88.773 2.438,-88.646 0.279,-87.909 20.65,-87.706 19.406,-87.63 -4.089,-87.122 1.702,-86.716 5.613,-86.385 10.846,-86.157 19.812,-86.157 12.979,-85.903 0.483,-85.75 20.65,-85.395 9.855,-84.633 14.3,-84.531 4.775,-84.506 12.37,-84.176 20.853,-84.049 18.517,-84.023 10.236,-83.693 13.945,-83.134 16.942,-82.804 12.09,-82.728 20.853,-82.169 18.313,-82.093 10.82,-81.636 7.569,-81.585 13.868,-81.382 16.358,-81.331 19.406,-81.305 -43.815,-80.874 -37.567,-80.848 -40.564,-80.747 -46.304,-80.569 20.98,-80.467 4.623,-80.137 6.985,-80.137 -34.874,-80.035 17.602,-79.985 11.379,-79.934 13.437,-79.578 19.482,-79.502 21.107,-79.197 16.281,-79.07 -20.955,-76.81 -8.814,-74.193 -36.246,-73.025 -22.022,-72.288 -9.652,-71.73 0.787,-71.552 -7.239,-71.526 -45.212,-71.476 -40.64,-71.476 -42.189,-71.399 -39.421,-71.399 -37.186,-71.399 -17.094,-71.374 -15.519,-71.349 -2.921,-71.323 -18.923,-71.298 -20.625,-71.272 -44.044,-71.171
IN1: P1.17 R69.2 U18.14 | length 19.7
  Top Layer w0.28: U18.14 v1(-14.166,-74.93) -14.166,-76.359 R69.2
  MidLayer2 w0.28: v1(-14.3,-86.995) -11.765,-84.46 -11.765,-76.271 -13.106,-74.93 v1(-14.166,-74.93)
  Bottom Layer w0.28: P1.17 v1@-14.305,-87
IN2: P1.13 R73.2 U18.10 | length 21.2
  Top Layer w0.28: R73.2 -19.246,-76.486 v1(-19.246,-74.955) U18.10
  MidLayer2 w0.28: v1(-19.246,-74.955) -18.415,-74.955 -13.513,-79.858 -13.513,-81.432 -13.513,-83.668 v1(-16.84,-86.995)
  Bottom Layer w0.28: P1.13 v1@-16.845,-87
INH: P1.15 R71.2 U18.12 | length 20.5
  Top Layer w0.28: U18.12 v1(-16.706,-74.955) -16.706,-76.334 R71.2
  MidLayer2 w0.28: v1(-16.706,-74.955) -15.646,-74.955 -12.675,-77.927 -12.675,-84.099 v1(-15.57,-86.995)
  Bottom Layer w0.28: P1.15 v1@-15.575,-87
NetC5_1: C5.1 U7.98 | length 6.8
  Top Layer w0.305: U7.98 19.245,-40.022 20.429,-41.206 C5.1
NetC6_1: C6.1 R45.1 U7.33 Y1.1 | length 9.4
  Top Layer w0.28: Y1.1 18.81,-15.113 18.821,-15.124 ; U7.33 16.745,-18.47 R45.1 Y1.1@16.762,-15.373
NetC8_1: C8.1 R45.2 U7.34 Y1.2 | length 11.6
  Top Layer w0.28: C8.1 11.403,-14.968 11.405,-14.97 ; Y1.2 13.462,-15.113 14.562,-16.213 R45.2 14.562,-19.312 16.245,-20.994 U7.34
NetD2_1: D2.1 R8.1 | length 11.7
  Top Layer w0.28: D2.1 7.29,-2.839 7.717,-3.266 7.717,-6.172 6.731,-7.158 R8.1
NetR2_1: R2.1 U6.1 | length 3.4
  Top Layer w0.28: U6.1 R2.1
NetR6_1: R6.1 U15.1 | length 3.5
  Top Layer w0.28: R6.1 -37.407,-63.292 U15.1
NetR10_1: R10.1 U6.3 | length 3.5
  Top Layer w0.28: U6.3 -1.275,-63.338 R10.1
NetR22_1: R22.1 U15.3 | length 3.5
  Top Layer w0.28: R22.1 -39.947,-63.3 U15.3
NetR40_1: R40.1 U14.1 | length 3.5
  Top Layer w0.28: U14.1 -24.49,-66.728 R40.1
NetR41_1: R41.1 U14.3 | length 3.5
  Top Layer w0.28: U14.3 -27.056,-63.37 R41.1
NetR44_1: R44.1 U14.5 | length 3.5
  Top Layer w0.28: U14.5 -29.596,-63.402 R44.1
NetR46_1: R46.1 U19.1 | length 3.2
  Top Layer w0.254: U19.1 -58.857,-76.41 R46.1
NetR47_1: R47.1 U19.3 | length 3.2
  Top Layer w0.254: U19.3 -56.317,-76.334 R47.1
NetR48_1: R48.1 U19.5 | length 3.2
  Top Layer w0.254: U19.5 -53.777,-76.321 R48.1
NetR52_1: R52.1 U19.7 | length 3.2
  Top Layer w0.254: U19.7 -51.237,-76.346 R52.1
NetR54_1: R54.1 U14.7 | length 3.5
  Top Layer w0.28: U14.7 -32.136,-63.435 R54.1
NetR57_1: R57.1 U4.13 | length 43
  Top Layer w0.28: v1(14.986,-71.018) U4.13 ; v1(17.792,-47.383) R57.1
  MidLayer2 w0.28: v1(14.986,-71.018) 6.934,-71.018 5.029,-69.113 5.029,-56.794 14.44,-47.383 v1(17.792,-47.383)
NetR58_1: R58.1 U6.5 | length 3.5
  Top Layer w0.28: U6.5 -3.815,-63.366 R58.1
NetR60_1: R60.1 U15.5 | length 3.5
  Top Layer w0.28: R60.1 -42.487,-63.309 U15.5
NetR62_1: R62.1 U6.7 | length 3.5
  Top Layer w0.28: U6.7 -6.355,-63.393 R62.1
NetR64_1: R64.1 U15.7 | length 3.5
  Top Layer w0.28: R64.1 -45.027,-63.317 U15.7
NetR66_1: R66.1 U18.1 | length 3.5
  Top Layer w0.28: U18.1 -11.607,-66.736 R66.1
NetR68_1: R68.1 U18.3 | length 3.5
  Top Layer w0.28: U18.3 -14.166,-63.33 R68.1
NetR70_1: R70.1 U18.5 | length 3.5
  Top Layer w0.28: U18.5 -16.706,-63.33 R70.1
NetR72_1: R72.1 U18.7 | length 3.5
  Top Layer w0.28: U18.7 -19.246,-63.33 R72.1
P1_A: P1.9 U19.6 | length 46.8
  Top Layer w0.28: v1(-52.507,-74.951) U19.6
  MidLayer2 w0.28: v1(-52.507,-74.951) -52.507,-84.069 -51.181,-85.395 -20.98,-85.395 v1(-19.38,-86.995)
  Bottom Layer w0.28: P1.9 v1@-19.385,-87
P7_A: P1.11 U19.8 | length 45.4
  Top Layer w0.28: v1(-49.967,-74.951) U19.8
  MidLayer2 w0.28: v1(-49.967,-74.951) -49.967,-83.739 -48.92,-84.785 -20.32,-84.785 v1(-18.11,-86.995)
  Bottom Layer w0.28: P1.11 v1@-18.115,-87
P13_A: P1.5 U19.2 | length 53.6
  Top Layer w0.28: v1(-57.587,-74.951) U19.2
  MidLayer2 w0.28: v1(-57.587,-74.951) -57.587,-83.841 -54.432,-86.995 -33.807,-86.995 -30.124,-90.678 -23.47,-90.678 -21.92,-89.129 v1(-21.92,-86.995)
  Bottom Layer w0.28: P1.5 v1@-21.925,-87
PA2: U7.76 U15.6 | length 68.4
  Top Layer w0.28: v1@-43.764,-65.303 v1(-43.757,-65.311) U15.6 ; v1@4.369,-37.516 v1(4.377,-37.524) U7.76
  MidLayer2 w0.28: v1(-43.757,-65.311) -43.757,-62.502 -42.951,-61.697 -16.688,-61.697 4.369,-40.64 v1@4.369,-37.516
PA2_A: P1.8 R61.2 U15.12 | length 33.4
  Top Layer w0.254: R61.2 -42.487,-76.546 v1(-42.487,-74.752) U15.12
  MidLayer2 w0.254: v1(-42.487,-74.752) -42.487,-80.068 -40.259,-82.296 -21.437,-82.296 v1(-20.645,-83.087)
  Bottom Layer w0.28: P1.8@-20.65,-84.785 v1@-20.65,-83.092
PA3_A: P1.7 U19.4 | length 47.7
  Top Layer w0.28: v1(-55.047,-74.951) U19.4
  MidLayer2 w0.28: v1(-55.047,-74.951) -55.047,-83.282 -52.273,-86.055 -21.59,-86.055 v1(-20.65,-86.995)
  Bottom Layer w0.28: P1.7 v1@-20.655,-87
PA6: U7.72 U14.6 | length 60.2
  Top Layer w0.28: v1@-30.874,-65.303 v1(-30.866,-65.311) U14.6 ; U7.72 8.757,-34.474 8.763,-34.468 v1(8.382,-34.468)
  MidLayer2 w0.28: v1(-30.866,-65.311) -30.866,-64.42 -30.353,-63.906 -14.63,-63.906 7.267,-42.009 7.267,-38.148 8.382,-37.033 v1(8.382,-34.468)
PA6_A: P1.16 R43.2 U14.12 | length 23.8
  Top Layer w0.254: U14.12 v1(-29.596,-74.879) -29.596,-76.27 R43.2
  MidLayer2 w0.254: v1(-29.596,-74.879) -29.596,-77.211 -26.975,-79.832 -18.833,-79.832 v1(-15.57,-83.095)
  Bottom Layer w0.28: P1.16 v1@-15.575,-83.1
PB1: P10.3 U7.20 | length 26.3
  Top Layer w0.28: U7.20 v1(23.869,-26.474) v1@23.876,-26.467
  MidLayer2 w0.28: v1(23.869,-26.474) 25.322,-25.021 25.322,-4.399 P10.3
PB2: P10.4 U7.21 | length 22.2
  Top Layer w0.28: U7.21 23.404,-25.974 v1(24.359,-25.019)
  MidLayer2 w0.28: P10.4 24.359,-5.976 v1(24.359,-25.019)
PB3: P10.1 U7.22 | length 30.3
  Top Layer w0.28: U7.22 23.015,-25.474 v1(23.546,-24.943)
  MidLayer2 w0.28: v1(23.546,-24.943) 23.182,-24.579 23.182,-3.505 23.182,-2.388 24.02,-1.549 26.518,-1.549 26.797,-1.829 26.797,-3.324 P10.1
PB4: U7.23 U18.4 | length 65.5
  Top Layer w0.28: U18.4 v1(-15.436,-65.311) ; v1@19.126,-25.4 v1(19.025,-25.298) 20.217,-25.298 20.542,-24.974 U7.23
  MidLayer2 w0.28: v1(-15.436,-65.311) -13.876,-65.311 8.255,-43.18 8.255,-39.04 9.576,-37.719 9.576,-28.321 10.084,-27.813 v1(10.084,-24.867)
  Bottom Layer w0.28: v1(10.084,-24.867) 18.593,-24.867 v1(19.025,-25.298)
PB5: U6.2 U7.24 | length 54.5
  Top Layer w0.28: v1@-0.012,-65.303 v1(-0.005,-65.311) U6.2 ; v1@20.218,-24.46 20.232,-24.474 U7.24
  MidLayer2 w0.28: v1(-0.005,-65.311) -0.005,-57.714 14.249,-43.459 14.249,-26.619 16.383,-24.486 v1(20.218,-24.486)
PB5_A: P1.25 R5.2 U6.16 | length 23.9
  Top Layer w0.28: R5.2 1.265,-76.397 v1(1.265,-74.778) U6.16
  MidLayer2 w0.28: v1(-9.22,-86.995) -9.22,-87.452 -8.89,-87.782 -7.62,-87.782 -7.264,-87.427 -7.254,-87.427 -7.254,-84.572 -7.254,-84.288 1.265,-75.768 v1(1.265,-74.778)
  Bottom Layer w0.28: P1.25 v1@-9.225,-87
PB6: U7.25 U15.4 | length 94.9
  Top Layer w0.28: v1@-41.224,-65.303 v1(-41.217,-65.311) U15.4 ; U7.25 v1(21.795,-22.607)
  MidLayer2 w0.28: v1(-41.217,-65.311) -41.217,-63.01 -40.488,-62.281 -16.027,-62.281 5.309,-40.945 5.309,-24.003 6.833,-22.479 21.667,-22.479 v1(21.795,-22.607)
PB6_A: P1.10 R35.2 U15.14 | length 32
  Top Layer w0.28: U15.14 v1(-39.947,-74.701) -39.947,-76.545 R35.2
  MidLayer2 w0.28: v1(-39.947,-74.701) -39.947,-78.061 -39.947,-79.738 -37.948,-81.737 -20.738,-81.737 v1(-19.38,-83.095)
  Bottom Layer w0.28: P1.10 v1@-19.385,-83.1
PB7: U7.26 U15.2 | length 90.6
  Top Layer w0.28: v1@-38.684,-65.303 v1(-38.677,-65.311) U15.2 ; v1(20.245,-23.791) U7.26
  MidLayer2 w0.28: v1(-38.677,-65.311) -38.677,-63.721 -37.795,-62.84 -15.519,-62.84 6.147,-41.173 6.147,-24.232 7.188,-23.19 19.991,-23.19 20.245,-23.444 v1(20.245,-23.791) v1@20.32,-23.716
PB7_A: P1.12 R7.2 U15.16 | length 30.5
  Top Layer w0.28: U15.16 v1(-37.407,-74.752) -37.407,-76.536 R7.2
  MidLayer2 w0.28: v1(-37.407,-74.752) -37.407,-77.858 -37.407,-79.535 -35.763,-81.178 -20.027,-81.178 v1(-18.11,-83.095)
  Bottom Layer w0.28: P1.12 v1@-18.115,-83.1
PC0: D2.2 U7.53 | length 22.9
  Top Layer w0.28: D2.2 6.04,-7.95 3.861,-10.13 3.861,-23.622 5.213,-24.974 U7.53
PD0: R67.2 U7.43 U18.16 | length 63.9
  Top Layer w0.28: v1@-11.626,-71.628 U18.16 -11.626,-74.803 -11.626,-76.13 R67.2 ; v1@11.745,-24.114 v1(11.76,-24.13) 11.76,-22.439 U7.43
  MidLayer2 w0.28: v1(-11.626,-71.603) -11.626,-69.24 -8.382,-65.997 -8.382,-61.874 10.947,-42.545 10.947,-29.261 11.76,-28.448 v1(11.76,-24.13)
PD1: R50.2 U7.44 U19.14 | length 106.3
  Top Layer w0.28: R50.2 -56.317,-63.37 v1(-56.317,-64.897) U19.14 ; U7.44 v1(11.245,-19.507)
  MidLayer2 w0.28: v1(-56.317,-64.897) -56.317,-60.177 -55.347,-59.207 -18.339,-59.207 0.826,-40.043 0.826,-32.829 1.854,-31.801 1.854,-20.574 2.921,-19.507 v1(11.245,-19.507)
PD2: R49.2 U7.45 U19.16 | length 109.1
  Top Layer w0.28: R49.2 -58.857,-63.399 v1(-58.857,-64.846) U19.16 ; v1(10.262,-18.771) 10.262,-20.142 10.745,-20.625 U7.45
  MidLayer2 w0.28: v1(-58.857,-64.846) -58.857,-60.025 -57.328,-58.496 -18.898,-58.496 0.229,-39.37 0.229,-32.639 1.321,-31.547 1.321,-19.99 2.54,-18.771 v1(10.262,-18.771)
PD3: R53.2 U7.46 U19.10 | length 98.5
  Top Layer w0.28: U19.10 v1(-51.237,-64.973) R53.2 ; v1(9.474,-20.295) 10.245,-21.065 U7.46
  MidLayer2 w0.28: v1(-51.237,-64.973) -51.237,-61.193 -50.597,-60.554 -17.475,-60.554 2.87,-40.208 2.87,-21.133 3.708,-20.295 8.712,-20.295 v1(9.474,-20.295)
PD7: U7.50 U18.6 | length 63.2
  Top Layer w0.28: U18.6 v1(-17.976,-65.311) ; v1(8.245,-23.791) U7.50
  MidLayer2 w0.28: v1(-17.976,-65.311) -17.976,-65.514 -17.247,-66.243 -12.319,-66.243 -11.608,-65.532 -11.608,-64.16 10.185,-42.367 10.185,-28.804 10.973,-28.016 10.973,-24.816 9.948,-23.791 v1(8.245,-23.791)
PE3: U6.8 U7.5 | length 50.8
  Top Layer w0.28: v1@-7.632,-65.303 v1(-7.625,-65.311) U6.8 ; v1(19.837,-34.341) 20.204,-33.974 U7.5
  MidLayer2 w0.28: v1(-7.625,-65.311) -7.625,-62.159 11.811,-42.723 v1(11.811,-34.341)
  Bottom Layer w0.28: v1(11.811,-34.341) 12.065,-34.087 18.313,-34.087 18.567,-34.341 v1(19.837,-34.341)
PE3_A: P1.19 R63.2 U6.10 | length 21.4
  Top Layer w0.28: R63.2 -6.355,-76.397 v1(-6.355,-74.854) U6.10
  MidLayer2 w0.28: v1(-13.03,-86.995) -11.024,-84.988 -11.024,-80.62 -11.024,-76.886 -8.992,-74.854 v1(-6.355,-74.854)
  Bottom Layer w0.28: P1.19 v1@-13.035,-87
PE4: R51.2 U7.6 U19.12 | length 98.9
  Top Layer w0.28: R51.2 -53.777,-63.34 v1(-53.777,-64.948) U19.12 ; v1@19.763,-33.474 U7.6
  MidLayer2 w0.28: v1(-53.777,-64.948) -53.777,-60.558 -53.111,-59.893 -17.907,-59.893 1.702,-40.284 1.702,-34.366 ; 1.702,-34.087 1.702,-34.366 ; v1(1.702,-33.472) 1.702,-34.366
  Bottom Layer w0.28: v1(1.702,-33.472) v1(19.761,-33.472)
PE5: P1.22 U7.7 | length 74.2
  Top Layer w0.28: v1(19.787,-32.614) 20.147,-32.974 U7.7
  MidLayer2 w0.28: v1(-8.357,-80.772) -8.357,-79.019 -7.544,-78.207 -2.032,-78.207 0.432,-75.743 0.432,-74.371 3.353,-71.45 3.353,-56.642 15.799,-44.196 15.799,-33.172 16.358,-32.614 v1(19.787,-32.614)
  Bottom Layer w0.28: P1.22 -11.765,-82.448 ; -11.765,-82.301 -11.765,-82.448 ; v1(-8.357,-80.772) -10.744,-80.772 -11.765,-81.793 -11.765,-82.448
PF6: U7.91
PG5: U6.6 U7.1 | length 48
  Top Layer w0.28: v1@-5.092,-65.303 v1(-5.085,-65.311) U6.6 ; v1(19.99,-35.535) 20.429,-35.974 U7.1
  MidLayer2 w0.28: v1(-5.085,-65.311) -5.085,-60.558 12.548,-42.926 v1(12.548,-35.535)
  Bottom Layer w0.28: v1(12.548,-35.535) v1(19.99,-35.535)
PG5_A: P1.21 R59.2 U6.12 | length 22.7
  Top Layer w0.28: R59.2 -3.815,-76.397 v1(-3.815,-74.905) U6.12
  MidLayer2 w0.28: v1(-11.76,-86.995) -10.516,-85.75 -10.516,-77.673 -8.788,-75.946 -4.856,-75.946 v1(-3.815,-74.905)
  Bottom Layer w0.28: P1.21 v1@-11.765,-87
PH0_RXD2: R39.2 U7.12 U14.14 | length 87
  Top Layer w0.28: U14.14 v1(-27.056,-74.701) -27.056,-76.244 R39.2 ; v1@-22.149,-65.735 v1(-22.149,-56.312) ; v1(18.364,-30.886) 19.939,-30.886 20.352,-30.474 U7.12
  MidLayer2 w0.28: v1(-27.056,-74.701) -27.056,-68.153 -24.638,-65.735 v1(-22.174,-65.735) ; v1(-22.149,-56.312) -18.847,-56.312 -0.796,-38.261 -0.796,-29.6 v1(0.381,-28.423)
  Bottom Layer w0.28: v1(0.381,-28.423) 1.118,-29.159 16.637,-29.159 v1(18.364,-30.886)
PH0_RXD2_A: P1.18 U14.4 | length 28.4
  Top Layer w0.28: v1(-28.326,-68.303) U14.4
  MidLayer2 w0.28: v1(-28.326,-68.303) -28.326,-76.779 -25.933,-79.172 -18.223,-79.172 v1(-14.3,-83.095)
  Bottom Layer w0.28: P1.18 v1@-14.305,-83.1
PH1_TXD2: P1.26 U7.13 | length 74.5
  Top Layer w0.28: v1(19.761,-29.972) 19.763,-29.974 U7.13
  MidLayer2 w0.28: v1(-9.22,-83.095) -9.22,-78.715 -8.077,-77.572 -2.464,-77.572 -0.254,-75.362 -0.254,-74.041 2.642,-71.145 2.642,-56.286 15.011,-43.917 15.011,-30.734 15.773,-29.972 v1(19.761,-29.972)
  Bottom Layer w0.28: P1.26 v1@-9.225,-83.1
PH5: U6.4 U7.17 | length 53.7
  Top Layer w0.28: v1@-2.552,-65.303 v1(-2.545,-65.311) U6.4 ; v1(19.761,-28.042) 20.387,-28.042 20.455,-27.974 U7.17
  MidLayer2 w0.28: v1(-2.545,-65.311) -2.545,-59.111 13.411,-43.155 v1(13.411,-28.042)
  Bottom Layer w0.28: v1(13.411,-28.042) v1(19.761,-28.042)
PH5_A: P1.23 R18.2 U6.14 | length 23.8
  Top Layer w0.254: R18.2 -1.275,-76.423 v1(-1.275,-74.955) U6.14
  MidLayer2 w0.254: v1(-10.49,-86.995) -9.855,-86.36 -9.855,-78.384 -8.191,-76.721 -3.95,-76.721 -2.184,-74.955 v1(-1.275,-74.955)
  Bottom Layer w0.28: P1.23 v1@-10.495,-87
PH6: U7.18 U18.8 | length 67.4
  Top Layer w0.28: v1@-20.523,-65.303 v1(-20.516,-65.311) U18.8 ; v1(18.999,-27.356) 20.32,-27.356 20.438,-27.474 U7.18
  MidLayer2 w0.28: v1(-20.516,-65.311) -19.645,-64.44 -14.199,-64.44 7.727,-42.514 7.727,-38.577 8.992,-37.313 8.992,-27.788 v1(9.423,-27.356)
  Bottom Layer w0.28: v1(9.423,-27.356) v1(18.999,-27.356)
PJ0_RX3: R38.2 U7.63 U14.16 | length 67.8
  Top Layer w0.28: U14.16 v1(-24.516,-74.727) -24.516,-76.244 R38.2 ; v1@-21.514,-66.802 v1(-21.514,-56.972) ; v1(0.508,-29.87) 0.544,-29.906 5.368,-29.906 5.436,-29.974 U7.63
  MidLayer2 w0.28: v1(-24.516,-74.727) -24.516,-67.671 -23.647,-66.802 v1(-21.539,-66.802) ; v1(-21.514,-56.972) -18.517,-56.972 -0.33,-38.786 -0.33,-30.709 v1(0.508,-29.87)
PJ0_RX3_A: P1.20 U14.2 | length 27.2
  Top Layer w0.28: v1(-25.786,-68.303) U14.2
  MidLayer2 w0.28: v1(-25.786,-68.303) -25.786,-76.881 -23.96,-78.707 -17.407,-78.707 v1(-14.351,-81.763)
  Bottom Layer w0.28: v1(-14.351,-81.763) -13.035,-83.079 P1.20
PJ1_A: P1.6 R65.2 U15.10 | length 35.3
  Top Layer w0.254: R65.2 -45.027,-76.538 v1(-45.027,-74.854) U15.10
  MidLayer2 w0.254: v1(-45.027,-74.854) -45.027,-81.287 -43.219,-83.095 v1(-21.92,-83.095)
  Bottom Layer w0.28: P1.6 v1@-21.925,-83.1
PJ1_TX3: U7.64 U15.8 | length 76
  Top Layer w0.28: v1@-46.304,-65.303 v1(-46.297,-65.311) U15.8 ; v1(4.597,-30.48) 4.604,-30.474 U7.64
  MidLayer2 w0.28: v1(-46.297,-65.311) -46.297,-62.121 -45.263,-61.087 -17.094,-61.087 3.759,-40.234 3.759,-31.318 v1(4.597,-30.48) ; v1@4.61,-30.493 v1@4.623,-30.48
PK1: P1.29 U7.88 | length 68.5
  Top Layer w0.28: U7.88 14.245,-35.336 14.783,-34.798 15.621,-34.798 ; 15.951,-34.798 15.621,-34.798 ; v1(16.535,-34.798) 15.621,-34.798
  MidLayer2 w0.28: v1(-6.68,-86.995) -6.68,-84.404 3.962,-73.762 3.962,-56.921 16.535,-44.348 v1(16.535,-34.798)
  Bottom Layer w0.28: P1.29 v1@-6.685,-87
PK3: U7.86 U14.8 | length 67
  Top Layer w0.28: v1@-33.414,-65.303 v1(-33.406,-65.311) U14.8 ; v1(12.776,-34.823) 13.245,-35.292 U7.86
  MidLayer2 w0.28: v1(-33.406,-65.311) -33.406,-63.864 -32.842,-63.3 -14.938,-63.3 6.807,-41.554 6.807,-37.821 ; 6.807,-37.567 6.807,-37.821 ; v1(6.807,-36.906) 6.807,-37.821
  Bottom Layer w0.28: v1(6.807,-36.906) 8.23,-35.484 11.547,-35.484 11.989,-35.042 12.116,-34.915 12.685,-34.915 v1(12.776,-34.823)
PK3_A: P1.14 R55.2 U14.10 | length 26
  Top Layer w0.28: R55.2@-32.136,-76.498 v1(-32.136,-74.803) U14.10
  MidLayer2 w0.28: v1(-32.136,-74.803) -32.136,-76.804 -32.136,-78.811 -30.48,-80.467 -19.468,-80.467 v1(-16.84,-83.095)
  Bottom Layer w0.28: P1.14 v1@-16.845,-83.1
RESET: C4.1 P10.5 R9.1 U7.30 | length 27.6
  Top Layer w0.28: U7.30 18.245,-21.481 18.758,-20.968 22.314,-20.968 23.338,-19.944 23.338,-15.25 ; v1(20.955,-15.265) 22.098,-15.265 22.114,-15.25 23.338,-15.25 ; 23.343,-15.254 23.338,-15.25 ; R9.1@24.536,-15.25 23.338,-15.25
  MidLayer2 w0.28: v1(20.955,-15.265) 20.442,-14.753 20.442,-4.599 P10.5
霍尔: P1.27 U18.2 | length 32.7
  Top Layer w0.28: v1@-12.903,-65.303 v1(-12.896,-65.311) U18.2
  MidLayer2 w0.28: v1(-7.95,-86.995) -7.95,-83.947 -6.121,-82.118 v1(-6.121,-80.721)
  Bottom Layer w0.28: v1(-12.896,-65.311) -12.896,-66.403 -12.545,-66.754 -6.355,-66.754 -5.283,-67.826 -5.283,-79.883 v1(-6.121,-80.721) ; P1.27 v1@-7.955,-87
pads on no net: U7.2 U7.3 U7.4 U7.8 U7.9 U7.14 U7.15 U7.16 U7.19 U7.27 U7.28 U7.29 U7.35 U7.36 U7.37 U7.38 U7.39 U7.40 U7.41 U7.42 U7.47 U7.48 U7.49 U7.51 U7.52 U7.54 U7.55 U7.56 U7.57 U7.58 U7.59 U7.60 U7.65 U7.66 U7.67 U7.68 U7.69 U7.70 U7.71 U7.73 U7.74 U7.75 U7.77 U7.78 U7.79 U7.82 U7.83 U7.84 U7.85 U7.87 U7.90 U7.92 U7.93 U7.94 U7.95 U7.96 U7.97
copper on no net:
  other v1: -1.372,-70.358

## Polygon pours and split planes (outlines as drawn)
GND on Top Layer "Top Layer-No Net" (solid, remove dead copper, pour order 1000): -47.066,-70.485 -35.712,-70.485 -35.712,-72.74 -35.712,-76.659 -23.089,-76.659 -22.758,-76.659 -22.758,-71.866 -22.758,-70.485 -14.707,-70.485 -14.707,-75.903 -9.804,-75.903 -9.804,-71.021 2.159,-71.021 2.159,-78.181 2.159,-78.237 23.749,-78.237 24.028,-78.237 24.028,-91.515 24.028,-95.885 22.53,-95.885 -21.006,-95.885 -21.006,-82.089 -21.006,-82.071 -47.066,-82.071 -47.066,-70.485
AGND on Top Layer "Top Layer-No Net" (solid, remove dead copper, pour order 1001): -65.126,-93.243 -22.885,-93.243 -22.885,-90.373 -22.885,-83.718 -25.984,-83.718 -48.717,-83.718 -48.717,-81.839 -48.717,-68.58 -45.644,-68.58 -33.909,-68.58 -33.909,-73.228 -33.909,-74.473 -23.927,-74.473 -23.952,-74.473 -23.952,-72.517 -23.952,-68.58 -16.713,-68.58 -13.487,-68.58 -13.487,-72.263 -13.487,-74.803 -11.024,-74.803 -11.024,-72.517 -11.024,-68.682 -5.029,-68.682 3.683,-68.682 3.683,-71.679 3.683,-75.794 13.894,-75.794 35.687,-75.794 35.687,-64.821 35.687,11.506 32.868,11.506 -74.168,11.506 -74.168,-2.819 -74.168,-93.294 -64.872,-93.294
GND on MidLayer1 "Top Layer-No Net" (solid, remove dead copper, pour order 1002): -47.066,-70.485 -35.712,-70.485 -35.712,-72.74 -35.712,-76.659 -23.089,-76.659 -22.758,-76.659 -22.758,-71.866 -22.758,-70.485 -14.707,-70.485 -14.707,-75.903 -9.804,-75.903 -9.804,-71.021 2.159,-71.021 2.159,-78.181 2.159,-78.237 23.749,-78.237 24.028,-78.237 24.028,-91.515 24.028,-95.885 22.53,-95.885 -21.006,-95.885 -21.006,-82.089 -21.006,-82.071 -47.066,-82.071 -47.066,-70.485
AGND on MidLayer1 "Top Layer-No Net" (solid, remove dead copper, pour order 1003): -65.141,-93.228 -22.901,-93.228 -22.901,-90.357 -22.901,-83.703 -26,-83.703 -48.733,-83.703 -48.733,-81.823 -48.733,-68.564 -45.66,-68.564 -33.925,-68.564 -33.925,-73.212 -33.925,-74.457 -23.943,-74.457 -23.968,-74.457 -23.968,-72.501 -23.968,-68.564 -16.729,-68.564 -13.503,-68.564 -13.503,-72.247 -13.503,-74.787 -11.039,-74.787 -11.039,-72.501 -11.039,-68.666 -5.045,-68.666 3.667,-68.666 3.667,-71.663 3.667,-75.778 13.878,-75.778 35.671,-75.778 35.671,-64.805 35.671,11.522 32.852,11.522 -74.184,11.522 -74.184,-2.804 -74.184,-93.278 -64.887,-93.278
GND on MidLayer2 "Top Layer-No Net" (solid, remove dead copper, pour order 1004): -47.066,-70.485 -35.712,-70.485 -35.712,-72.74 -35.712,-76.659 -23.089,-76.659 -22.758,-76.659 -22.758,-71.866 -22.758,-70.485 -14.707,-70.485 -14.707,-75.903 -9.804,-75.903 -9.804,-71.021 2.159,-71.021 2.159,-78.181 2.159,-78.237 23.749,-78.237 24.028,-78.237 24.028,-91.515 24.028,-95.885 22.53,-95.885 -21.006,-95.885 -21.006,-82.089 -21.006,-82.071 -47.066,-82.071 -47.066,-70.485
AGND on MidLayer2 "Top Layer-No Net" (solid, remove dead copper, pour order 1005): -65.141,-93.228 -22.901,-93.228 -22.901,-90.357 -22.901,-83.703 -26,-83.703 -48.733,-83.703 -48.733,-81.823 -48.733,-68.564 -45.66,-68.564 -33.925,-68.564 -33.925,-73.212 -33.925,-74.457 -23.943,-74.457 -23.968,-74.457 -23.968,-72.501 -23.968,-68.564 -16.729,-68.564 -13.503,-68.564 -13.503,-72.247 -13.503,-74.787 -11.039,-74.787 -11.039,-72.501 -11.039,-68.666 -5.045,-68.666 3.667,-68.666 3.667,-71.663 3.667,-75.778 13.878,-75.778 35.671,-75.778 35.671,-64.805 35.671,11.522 32.852,11.522 -74.184,11.522 -74.184,-2.804 -74.184,-93.278 -64.887,-93.278
GND on Bottom Layer "Top Layer-No Net" (solid, remove dead copper, pour order 1006): -47.066,-70.485 -35.712,-70.485 -35.712,-72.74 -35.712,-76.659 -23.089,-76.659 -22.758,-76.659 -22.758,-71.866 -22.758,-70.485 -14.707,-70.485 -14.707,-75.903 -9.804,-75.903 -9.804,-71.021 2.159,-71.021 2.159,-78.181 2.159,-78.237 23.749,-78.237 24.028,-78.237 24.028,-91.515 24.028,-95.885 22.53,-95.885 -21.006,-95.885 -21.006,-82.089 -21.006,-82.071 -47.066,-82.071 -47.066,-70.485
AGND on Bottom Layer "Top Layer-No Net" (solid, remove dead copper, pour order 1007): -65.141,-93.228 -22.901,-93.228 -22.901,-90.357 -22.901,-83.703 -26,-83.703 -48.733,-83.703 -48.733,-81.823 -48.733,-68.564 -45.66,-68.564 -33.925,-68.564 -33.925,-73.212 -33.925,-74.457 -23.943,-74.457 -23.968,-74.457 -23.968,-72.501 -23.968,-68.564 -16.729,-68.564 -13.503,-68.564 -13.503,-72.247 -13.503,-74.787 -11.039,-74.787 -11.039,-72.501 -11.039,-68.666 -5.045,-68.666 3.667,-68.666 3.667,-71.663 3.667,-75.778 13.878,-75.778 35.671,-75.778 35.671,-64.805 35.671,11.522 32.852,11.522 -74.184,11.522 -74.184,-2.804 -74.184,-93.278 -64.887,-93.278

## Keep-outs
Keep-Out Layer:
  circle w0.05: c-38.5,-20 r0.025
  circle w0.05: c-38.5,-20 r0.025
  circle w0.05: c-38.5,-20 r0.025
  circle w0.05: c-38.5,-20 r0.025
  circle w0.1: c12.178,-4.375 r1.6
  circle w0.1: c12.153,-4.375 r1.6
  lines w0.127: -61.12,-49.911 -62.819,-49.911 -62.819,-92 -47.879,-92 -47.879,-87.757 -37.592,-87.757 -37.592,-92 22.082,-92 22.082,-66.675 8.89,-66.675 8.89,-53.721 31.415,-53.721 31.415,-0.915 30.5,0 0,0 -1,-1 -1,-20 cw(c-38.5,-20) -61.12,-49.909

## Other copper
Top Layer:
  rectangle net +5VV: -30.328,-89.84 -25.603,-88.036
  rectangle net +5VV: -28.169,-88.824 -25.629,-87.478
  rectangle net +5V: -5.613,-86.055 -0.61,-83.515
Bottom Layer:
  rectangle net +5VV: -28.092,-89.893 -24.105,-87.503
  region net +5V: -3.058,-83.593 -7.045,-83.593 -7.045,-85.983 -3.058,-85.983

## Silkscreen, mask and mechanical layers (free items; w line width, h text height)
Top Overlay:
  circle w0.254: c12.178,-4.375 r4
  text "ISP" at 25.781,-8.331 h0.8
Top Solder:
  lines w1: 0.254,-51.562 0.254,-48.23 ; 0.453,-34.189 0.453,-30.857 ; 0.453,-24.792 0.453,-21.46 ; 0.453,-15.394 0.453,-12.062 ; 1.748,-9.597 3.073,-9.576 ; 2.286,-51.816 5.618,-51.816 ; 10.795,-51.816 14.127,-51.816 ; 11.649,-9.597 14.981,-9.597 ; 19.939,-51.816 23.271,-51.816 ; 21.551,-9.597 24.883,-9.597 ; 26.162,-51.308 26.162,-47.976 ; 26.255,-43.587 26.255,-40.255 ; 26.255,-34.189 26.255,-30.857 ; 26.255,-24.792 26.255,-21.46 ; 26.255,-15.394 26.255,-12.062
  lines w1.016: -61.468,-77.749 -61.468,-84.658 -53.772,-84.658 ; -61.468,-71.399 -61.468,-66.37 ; -61.468,-62.56 -61.468,-58.293 -55.093,-58.293 ; -46.888,-58.293 -39.522,-58.293 ; -31.75,-85.827 -31.75,-84.658 ; -24.206,-91.059 -16.993,-91.059 ; -17.577,-58.293 -13.818,-58.293 ; 1.168,-91.059 5.918,-91.059 ; 3.277,-58.293 7.366,-58.293 7.366,-62.509 ; 16.434,-91.059 20.574,-91.059 20.574,-86.462 ; 17.069,-67.691 20.574,-67.691 20.574,-70.764
Mechanical 15:
  lines w0.254: -24.401,-88 -24.401,-54.765 ; -22.35,-88 -22.35,-54.401 31.5,-54.401 ; -19.893,-52.529 31.5,-52.529

## Text inside footprints (layer, text, board x,y; h text height)
P1: Bottom Overlay "1" at -24.613,-90.881 h0.8; Bottom Overlay "2" at -24.46,-83.236 h0.8
P10: Top Overlay "1" at 28.513,-3.516 h0.8; Top Overlay "2" at 28.555,-6.225 h0.8; Top Overlay "5" at 19.147,-3.614 h0.8; Top Overlay "6" at 19.28,-6.365 h0.8